# Altium PCB Test6502_project_attempt_1(1).PcbDoc
Units mm, origin at the board's own origin, x right, y up, seen from the top; angles counter-clockwise.
Board outline 152.4 x 101.6 mm, 2 copper layers (F.Cu, B.Cu); 29 components, 99 nets, 323 pads, 7 vias.
Unrouted connection lines stored in the file: 20.
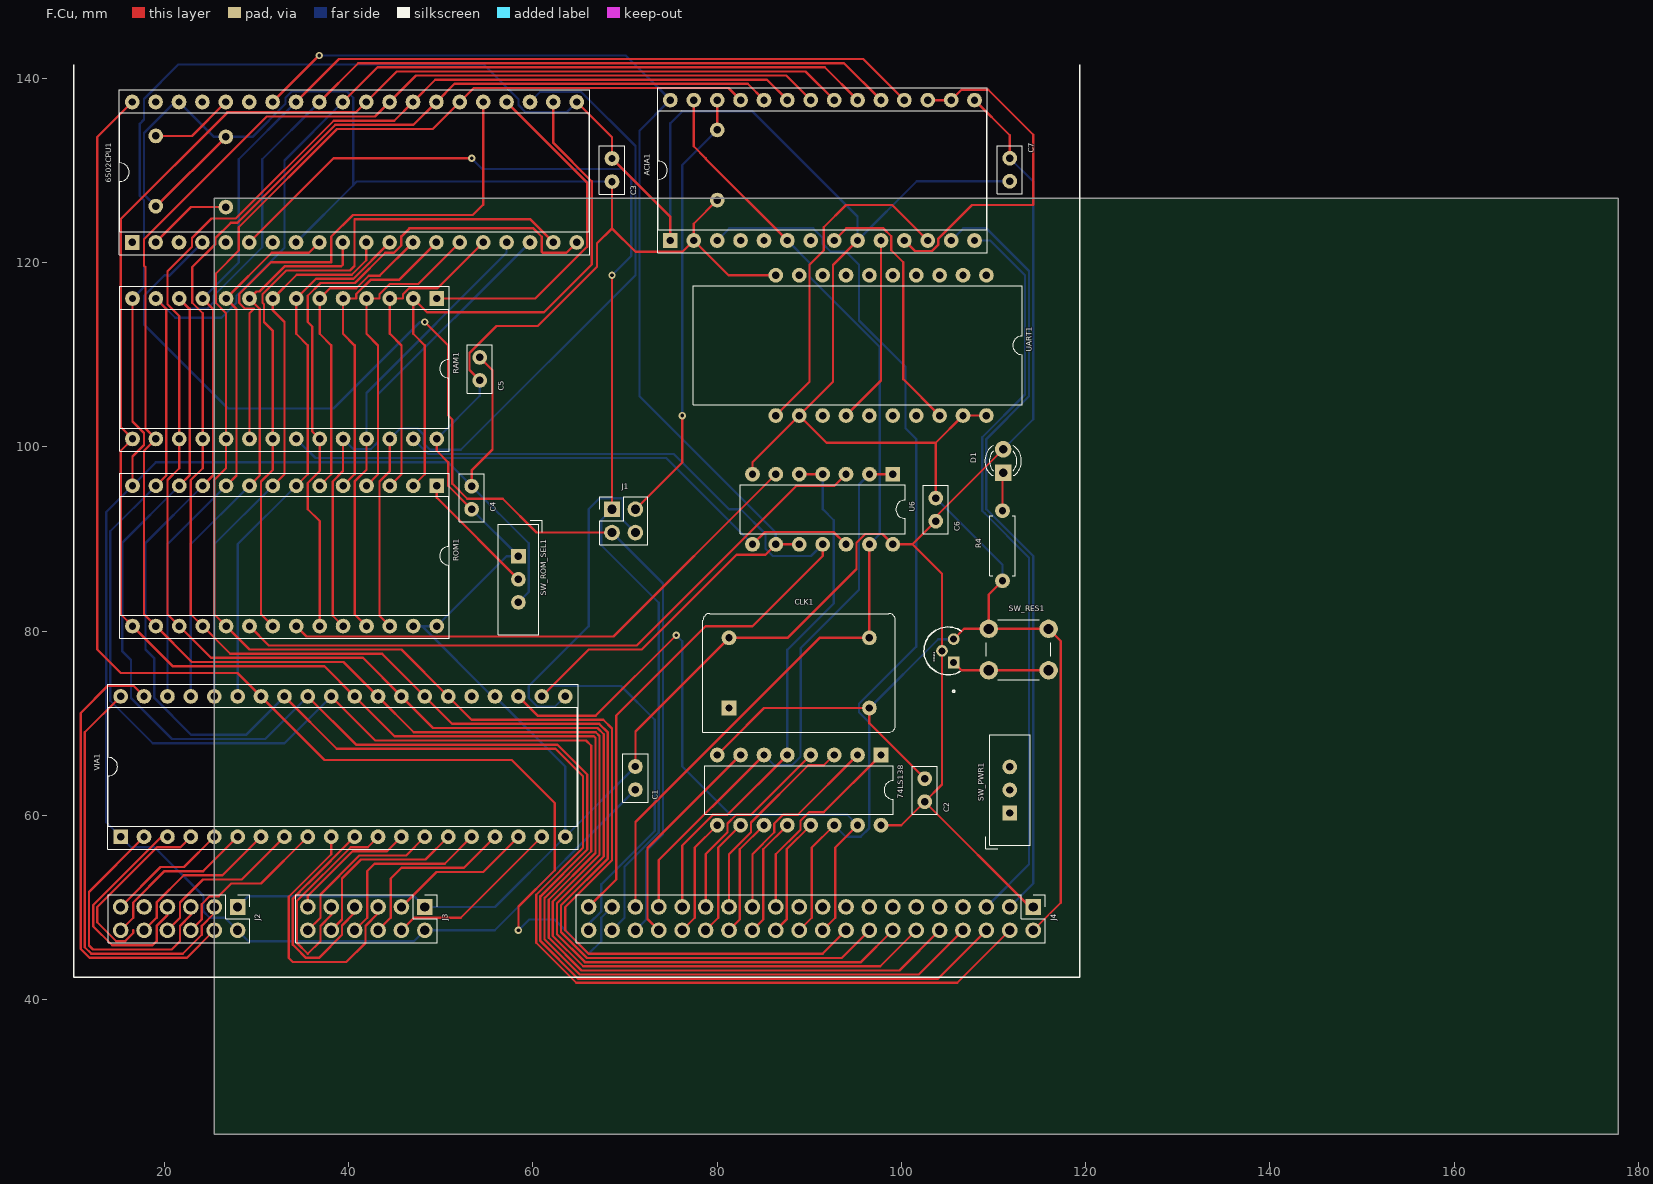
[diagram p0: F.Cu view]
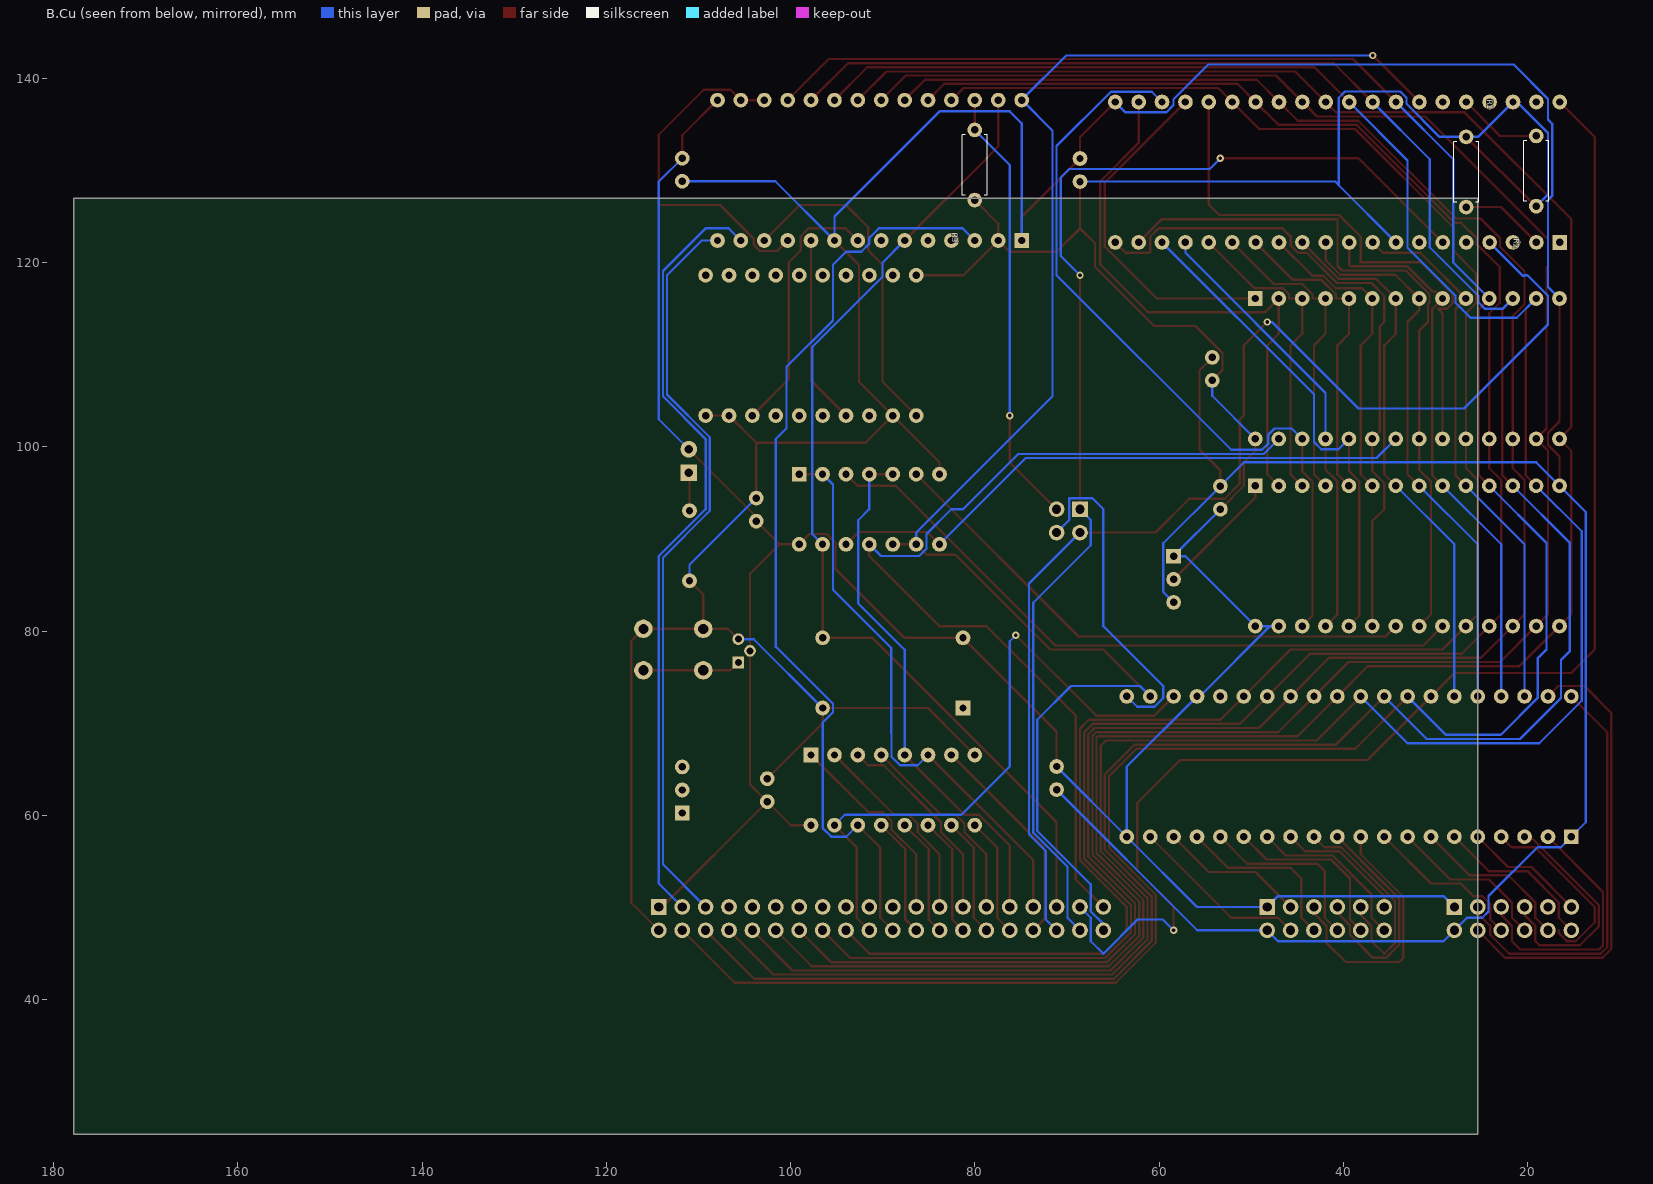
[diagram p1: B.Cu view, seen from below]

## Layer stack, top to bottom
F.Mask: solder mask 0.0102, Solder Resist, Dk 3.5
F.Cu: signal copper 0.0356
Dielectric 1: dielectric 0.32, FR-4, Dk 4.8
B.Cu: signal copper 0.0356
B.Mask: solder mask 0.0102, Solder Resist, Dk 3.5

## Board outline
25.4,25.4 177.8,25.4 177.8,127 25.4,127

## Design rules (kind name [scope] priority, off if disabled: settings)
Clearance [All] p1: gap=0.254 ignorepadtopadclearanceinfootprint=FALSE except(0: Arc-Hole Track-Hole SMDPad-Hole THPad-Hole Via-Hole Fill-Hole Poly-Hole Region-Hole Text-Hole)
MinimumSolderMaskSliver [All] p1: minsoldermaskwidth=0
PolygonConnect [All] p1: connectstyle=Direct reliefconductorwidth=0.254 reliefentries=4 polygonreliefangle="90 Angle" airgapwidth=0.254
RoutingVias [All] p1: holewidth=0.711 width=1.27 viastyle="Through Hole" minholewidth=0.711 minwidth=1.27 maxholewidth=0.711 maxwidth=1.27
SilkToSilkClearance [All] p1: silktosilkclearance=0
SilkToSolderMaskClearance [IsPad] p1: minsilkscreentomaskgap=0 clearancetoexposedcopper=TRUE
SolderMaskExpansion [All] p1: expansion=0.102 istentingtop=FALSE
Width [All] p1: maxlimit=10 minlimit=0.254 preferedwidth=0.254 minimp=50.000000 maximp=50.000000 favimp=50.000000
27 further rules are at their usual default settings.

## Components (designator, comment, footprint, x,y, rotation, side; value= is the part's Value field where it differs from the comment)
74LS138 "74LS138" DIP-16_W7.62mm 97.775,66.55 r270 top
6502CPU1 "W65C02SxP" DIP-40_W15.24mm_Socket 16.494,122.188 r90 top
ACIA1 "W65C51NxP" DIP-28_W15.24mm_Socket 74.915,122.393 r90 top
C1 "0.1uF" C_Disc_D5.0mm_W2.5mm_P2.50mm 71.12,65.29 r270 top
C2 "0.1uF" C_Disc_D5.0mm_W2.5mm_P2.50mm 102.522,61.479 r90 top
C3 "0.1uF" C_Disc_D5.0mm_W2.5mm_P2.50mm 68.58,128.79 r90 top
C4 "0.1uF" C_Disc_D5.0mm_W2.5mm_P2.50mm 53.34,93.23 r90 top
C5 "0.1uF" C_Disc_D5.0mm_W2.5mm_P2.50mm 54.231,107.207 r90 top
C6 "0.1uF" C_Disc_D5.0mm_W2.5mm_P2.50mm 103.725,91.931 r90 top
C7 "0.1uF" C_Disc_D5.0mm_W2.5mm_P2.50mm 111.76,131.33 r270 top
CLK1 "CXO_DIP14" Oscillator_DIP-14 81.28,71.64 r0 top
D1 "LED" LED_D3.0mm 111.041,97.193 r90 top
DS1813 "DS1813-5" 21-0248A 104.398,79.121 r90 top
J1 "INT_JMP" PinHeader_2x02_P2.54mm_Vertical 68.58,93.23 r0 top
J2 "VIA_PORTA" PinHeader_2x06_P2.54mm_Vertical 27.94,50.05 r270 top
J3 "VIA_PORTB" PinHeader_2x06_P2.54mm_Vertical 48.26,50.05 r270 top
J4 "Expansion_Header" PinHeader_2x20_P2.54mm_Vertical 114.3,50.05 r270 top
R1 "3.3k" R_Axial_DIN0207_L6.3mm_D2.5mm_P7.62mm_Horizontal#1 26.664,133.643 r90 bottom
R2 "3.3k" R_Axial_DIN0207_L6.3mm_D2.5mm_P7.62mm_Horizontal#1 19.056,126.126 r270 bottom
R3 "3.3k" R_Axial_DIN0207_L6.3mm_D2.5mm_P7.62mm_Horizontal#1 80.012,126.78 r270 bottom
R4 "220" R_Axial_DIN0207_L6.3mm_D2.5mm_P7.62mm_Horizontal#2 110.971,85.449 r90 top
RAM1 "HM62256BLP" DIP-28_W15.24mm_Socket 49.545,116.095 r270 top
ROM1 "28C256" DIP-28_W15.24mm_Socket 49.545,95.775 r270 top
SW_PWR1 "SW_SPDT" SW_THT_DPDT 111.76,62.75 r90 top
SW_RES1 "SW_Push" SW_PUSH_6mm 109.476,80.24 r0 top
SW_ROM_SEL1 "SW_SPDT" SW_THT_DPDT 58.42,85.61 r270 top
U6 "74LS00" DIP-14_W7.62mm 99.065,97.03 r270 top
UART1 "USB_UART_BOARD" DIP-20_W15.24mm_UART 111.76,118.63 r270 top
VIA1 "W65C22SxP" DIP-40_W15.24mm_Socket 15.24,57.665 r90 top

## Footprints (in the part's own frame and the unit in brackets; to place one, negate y for a bottom-side part, rotate by r counter-clockwise, add the part's x,y. Pads: shape width x height; smd on the part's side, far side on the other; paste and mask are expansions set on the pad)
21-0248A [mil]
  rect 50x50 hole 30 paste-50 mask+0: 1(-100,-50)
  round 50 hole 30 paste-50 mask+0: 2(-50,0) 3(0,-50)
  silkscreen extent -228,-85 52,77
C_Disc_D5.0mm_W2.5mm_P2.50mm [mm]
  round 1.6 hole 0.8 paste-1.6 mask+0: 1(0,0) 2(2.5,0)
  silkscreen extent -1.37,-1.37 3.87,1.37
DIP-14_W7.62mm [mm]
  rect 1.6x1.6 hole 0.8 paste-1.6 mask+0: 1(0,0)
  rrect100% 1.6x1.6 hole 0.8 paste-1.6 mask+0: 2(0,-2.54) 3(0,-5.08) 4(0,-7.62) 5(0,-10.16) 6(0,-12.7) 7(0,-15.24) 8(7.62,-15.24) 9(7.62,-12.7) 10(7.62,-10.16) 11(7.62,-7.62) 12(7.62,-5.08) 13(7.62,-2.54) 14(7.62,0)
  silkscreen extent 1.16,-16.57 6.46,1.33
DIP-16_W7.62mm [mm]
  rect 1.6x1.6 hole 0.8 paste-1.6 mask+0: 1(0,0)
  rrect100% 1.6x1.6 hole 0.8 paste-1.6 mask+0: 2(0,-2.54) 3(0,-5.08) 4(0,-7.62) 5(0,-10.16) 6(0,-12.7) 7(0,-15.24) 8(0,-17.78) 9(7.62,-17.78) 10(7.62,-15.24) 11(7.62,-12.7) 12(7.62,-10.16) 13(7.62,-7.62) 14(7.62,-5.08) 15(7.62,-2.54) 16(7.62,0)
  silkscreen extent 1.16,-19.11 6.46,1.33
DIP-20_W15.24mm_UART [mm]
  rrect100% 1.6x1.6 hole 0.8 paste-1.6 mask+0: 1(0,-2.54) 2(0,-5.08) 3(0,-7.62) 4(0,-10.16) 5(0,-12.7) 6(0,-15.24) 7(0,-17.78) 8(0,-20.32) 9(0,-22.86) 10(0,-25.4) 11(15.24,-25.4) 12(15.24,-22.86) 13(15.24,-20.32) 14(15.24,-17.78) 15(15.24,-15.24) 16(15.24,-12.7) 17(15.24,-10.16) 18(15.24,-7.62) 19(15.24,-5.08) 20(15.24,-2.54)
  silkscreen extent 1.16,-34.35 14.08,1.33
DIP-28_W15.24mm_Socket [mm]
  rect 1.6x1.6 hole 0.8 paste-1.6 mask+0: 1(0,0)
  rrect100% 1.6x1.6 hole 0.8 paste-1.6 mask+0: 2(0,-2.54) 3(0,-5.08) 4(0,-7.62) 5(0,-10.16) 6(0,-12.7) 7(0,-15.24) 8(0,-17.78) 9(0,-20.32) 10(0,-22.86) 11(0,-25.4) 12(0,-27.94) 13(0,-30.48) 14(0,-33.02) 15(15.24,-33.02) 16(15.24,-30.48) 17(15.24,-27.94) 18(15.24,-25.4) 19(15.24,-22.86) 20(15.24,-20.32) 21(15.24,-17.78) 22(15.24,-15.24) 23(15.24,-12.7) 24(15.24,-10.16) 25(15.24,-7.62) 26(15.24,-5.08) 27(15.24,-2.54) 28(15.24,0)
  silkscreen extent -1.33,-34.41 16.57,1.39
DIP-40_W15.24mm_Socket [mm]
  rect 1.6x1.6 hole 0.8 paste-1.6 mask+0: 1(0,0)
  rrect100% 1.6x1.6 hole 0.8 paste-1.6 mask+0: 2(0,-2.54) 3(0,-5.08) 4(0,-7.62) 5(0,-10.16) 6(0,-12.7) 7(0,-15.24) 8(0,-17.78) 9(0,-20.32) 10(0,-22.86) 11(0,-25.4) 12(0,-27.94) 13(0,-30.48) 14(0,-33.02) 15(0,-35.56) 16(0,-38.1) 17(0,-40.64) 18(0,-43.18) 19(0,-45.72) 20(0,-48.26) 21(15.24,-48.26) 22(15.24,-45.72) 23(15.24,-43.18) 24(15.24,-40.64) 25(15.24,-38.1) 26(15.24,-35.56) 27(15.24,-33.02) 28(15.24,-30.48) 29(15.24,-27.94) 30(15.24,-25.4) 31(15.24,-22.86) 32(15.24,-20.32) 33(15.24,-17.78) 34(15.24,-15.24) 35(15.24,-12.7) 36(15.24,-10.16) 37(15.24,-7.62) 38(15.24,-5.08) 39(15.24,-2.54) 40(15.24,0)
  silkscreen extent -1.33,-49.65 16.57,1.39
LED_D3.0mm [mm]
  rect 1.8x1.8 hole 0.9 paste-1.8 mask+0: 1(0,0)
  round 1.8 hole 0.9 paste-1.8 mask+0: 2(2.54,0)
  silkscreen extent -0.29,-1.99 2.94,1.99
Oscillator_DIP-14 [mm]
  rect 1.6x1.6 hole 0.8 paste-1.6 mask+0: 1(0,0)
  round 1.6 hole 0.8 paste-1.6 mask+0: 7(15.24,0) 8(15.24,7.62) 14(0,7.62)
  silkscreen extent -2.83,-2.64 18.07,10.26
PinHeader_2x02_P2.54mm_Vertical [mm]
  rect 1.7x1.7 hole 1 paste-1.7 mask+0: 1(0,0)
  rrect100% 1.7x1.7 hole 1 paste-1.7 mask+0: 2(2.54,0) 3(0,-2.54) 4(2.54,-2.54)
  silkscreen extent -1.33,-3.87 3.87,1.33
PinHeader_2x06_P2.54mm_Vertical [mm]
  rect 1.7x1.7 hole 1 paste-1.7 mask+0: 1(0,0)
  rrect100% 1.7x1.7 hole 1 paste-1.7 mask+0: 2(2.54,0) 3(0,-2.54) 4(2.54,-2.54) 5(0,-5.08) 6(2.54,-5.08) 7(0,-7.62) 8(2.54,-7.62) 9(0,-10.16) 10(2.54,-10.16) 11(0,-12.7) 12(2.54,-12.7)
  silkscreen extent -1.33,-14.03 3.87,1.33
PinHeader_2x20_P2.54mm_Vertical [mm]
  rect 1.7x1.7 hole 1 paste-1.7 mask+0: 1(0,0)
  rrect100% 1.7x1.7 hole 1 paste-1.7 mask+0: 2(2.54,0) 3(0,-2.54) 4(2.54,-2.54) 5(0,-5.08) 6(2.54,-5.08) 7(0,-7.62) 8(2.54,-7.62) 9(0,-10.16) 10(2.54,-10.16) 11(0,-12.7) 12(2.54,-12.7) 13(0,-15.24) 14(2.54,-15.24) 15(0,-17.78) 16(2.54,-17.78) 17(0,-20.32) 18(2.54,-20.32) 19(0,-22.86) 20(2.54,-22.86) 21(0,-25.4) 22(2.54,-25.4) 23(0,-27.94) 24(2.54,-27.94) 25(0,-30.48) 26(2.54,-30.48) 27(0,-33.02) 28(2.54,-33.02) 29(0,-35.56) 30(2.54,-35.56) 31(0,-38.1) 32(2.54,-38.1) 33(0,-40.64) 34(2.54,-40.64) 35(0,-43.18) 36(2.54,-43.18) 37(0,-45.72) 38(2.54,-45.72) 39(0,-48.26) 40(2.54,-48.26)
  silkscreen extent -1.33,-49.59 3.87,1.33
R_Axial_DIN0207_L6.3mm_D2.5mm_P7.62mm_Horizontal#1 [mm]
  round 1.6 hole 0.8 paste-1.6 mask+0: 1(0,0)
  rrect100% 1.6x1.6 hole 0.8 paste-1.6 mask+0: 2(-7.62,0)
  silkscreen extent -7.08,-1.37 -0.54,1.37
R_Axial_DIN0207_L6.3mm_D2.5mm_P7.62mm_Horizontal#2 [mm]
  round 1.6 hole 0.8 paste-1.6 mask+0: 1(0,0)
  rrect100% 1.6x1.6 hole 0.8 paste-1.6 mask+0: 2(7.62,0)
  silkscreen extent 0.54,-1.37 7.08,1.37
SW_PUSH_6mm [mm]
  round 2 hole 1.1 paste-2 mask+0: 1(0,0) 1(6.5,0) 2(0,-4.5) 2(6.5,-4.5)
  silkscreen extent -0.25,-5.5 6.75,1
SW_THT_DPDT [mm]
  rect 1.6x1.6 hole 0.8 paste-1.6 mask+0: 1(-2.5,0)
  round 1.6 hole 0.8 paste-1.6 mask+0: 2(0,0) 3(2.5,0)
  silkscreen extent -6.4,-2.2 6,2.6

## Part data
74LS138: library part DIP-16_W7.62mm, "16-lead though-hole mounted DIP package, row spacing 7.62 mm (300 mils)", Sheetfile=Test6502_project.kicad_sch
6502CPU1 VIA1: library part DIP-40_W15.24mm_Socket, "40-lead though-hole mounted DIP package, row spacing 15.24 mm (600 mils), Socket", Sheetfile=Test6502_project.kicad_sch
ACIA1 RAM1 ROM1: library part DIP-28_W15.24mm_Socket, "28-lead though-hole mounted DIP package, row spacing 15.24 mm (600 mils), Socket", Sheetfile=Test6502_project.kicad_sch
C1 C2 C3 C4 C5 C6 C7: library part C_Disc_D5.0mm_W2.5mm_P2.50mm, "C, Disc series, Radial, pin pitch=2.50mm, , diameter*width=5*2.5mm^2, Capacitor, http://cdn-reichelt.de/documents/datenblatt/B300/DS_KERKO_TC.pdf", Sheetfile=Test6502_project.kicad_sch
CLK1: library part Oscillator_DIP-14, "Oscillator, DIP14, http://cdn-reichelt.de/documents/datenblatt/B400/OSZI.pdf", Sheetfile=Test6502_project.kicad_sch
D1: library part LED_D3.0mm, "LED, diameter 3.0mm, 2 pins", Sheetfile=Test6502_project.kicad_sch
DS1813: library part 21-0248A, MANUFACTURER_PART_NUMBER=ds18135+, Sheetfile=Test6502_project.kicad_sch, VENDOR=MAXIM
J1: library part PinHeader_2x02_P2.54mm_Vertical, "Through hole straight pin header, 2x02, 2.54mm pitch, double rows", Sheetfile=Test6502_project.kicad_sch
J2 J3: library part PinHeader_2x06_P2.54mm_Vertical, "Through hole straight pin header, 2x06, 2.54mm pitch, double rows", Sheetfile=Test6502_project.kicad_sch
J4: library part PinHeader_2x20_P2.54mm_Vertical, "Through hole straight pin header, 2x20, 2.54mm pitch, double rows", Sheetfile=Test6502_project.kicad_sch
R1 R2 R3 R4: library part R_Axial_DIN0207_L6.3mm_D2.5mm_P7.62mm_Horizontal, "Resistor, Axial_DIN0207 series, Axial, Horizontal, pin pitch=7.62mm, 0.25W = 1/4W, length*diameter=6.3*2.5mm^2, http://cdn-reichelt.de/documents/datenblatt/B400/1_4W%23YAG.pdf", Sheetfile=Test6502_project.kicad_sch
SW_PWR1 SW_ROM_SEL1: library part SW_THT_DPDT, "E-Switch sub miniature slide switch, EG series, DPDT, http://spec_sheets.e-switch.com/specs/P040047.pdf", Sheetfile=Test6502_project.kicad_sch
SW_RES1: library part SW_PUSH_6mm, "https://www.omron.com/ecb/products/pdf/en-b3f.pdf", Sheetfile=Test6502_project.kicad_sch
U6: library part DIP-14_W7.62mm, "14-lead though-hole mounted DIP package, row spacing 7.62 mm (300 mils)", Sheetfile=Test6502_project.kicad_sch
UART1: library part DIP-20_W15.24mm_UART, "28-lead though-hole mounted DIP package, row spacing 15.24 mm (600 mils)", Sheetfile=Test6502_project.kicad_sch

## Via types
v1: diameter 0.8, hole 0.4, F.Cu to B.Cu, tented both sides, 7 vias

## Nets (pads, with @x,y where several pads share a name; then routed paths per layer and width w, separated by ;. In a path a pad name is that pad's centre, name@x,y a point inside that pad or via, vN(x,y) a via of type N, cw(c..) or ccw(c..) an arc to the next point about the centre after c; other vN are vias at no path point)
+5V: 74LS138.16 6502CPU1.8 6502CPU1.38 ACIA1.2 ACIA1.15 C1.1 C2.1 C3.1 C4.1 C5.1 C6.1 C7.1 CLK1.14 D1.2 DS1813.2 J2.1 J3.1 J4.1 R1.1 R2.1 R3.1 RAM1.28 ROM1.27 ROM1.28 SW_ROM_SEL1.1 U6.14 UART1.10 VIA1.20 VIA1.24 | length 425.2
  F.Cu w0.25: R2.1 19.147,126.126 R1.1 ; RAM1.28 49.545,99.565 50.8,98.31 50.8,95.77 C4.1 ; C5.1 53.106,108.331 53.106,110.172 56.047,113.114 60.521,113.114 66.958,119.551 66.958,122.088 68.58,123.71 ; C3.1 68.58,123.71 ; C1.1 71.12,69.1 CLK1.14 87.63,79.26 95.11,86.74 95.11,89.585 96.059,90.535 97.94,90.535 U6.14 101.204,89.41 ; R3.1 77.455,124.223 ACIA1.2 ; UART1.10 81.218,118.63 ACIA1.2 ; 74LS138.16 99.973,58.93 C2.1 ; ACIA1.15 111.76,133.808 C7.1 ; D1.2 103.725,92.417 C6.1 101.204,89.41 ; J4.1 113.95,50.05 C2.1 ; 68.58,123.71 71.12,121.17 76.232,121.17 ACIA1.2 ; 101.204,89.41 104.398,86.217 DS1813.2 104.398,63.355 C2.1
  B.Cu w0.25: R2.1 17.78,127.403 17.78,134.061 21.148,137.428 6502CPU1.38 25.36,133.643 R1.1 29.539,133.643 33.137,137.24 33.137,137.881 33.821,138.566 39.807,138.566 40.489,137.884 40.489,128.403 ; J2.1 29.115,51.225 47.085,51.225 J3.1 55.885,50.05 VIA1.20 ; 6502CPU1.8 40.489,128.403 ; RAM1.28 54.231,105.541 C5.1 ; C4.1 58.42,88.15 SW_ROM_SEL1.1 57.12,88.11 ROM1.28 ROM1.27 47.955,80.535 55.585,72.905 VIA1.24 63.5,65.285 VIA1.20 ; C3.1 40.876,128.79 40.489,128.403 ; C1.1 63.5,57.67 VIA1.20 ; D1.2 114.3,102.992 114.3,128.79 C7.1
A0: 6502CPU1.9 ACIA1.13 J4.3 RAM1.10 ROM1.10 VIA1.38 | length 144.4
  F.Cu w0.25: ROM1.10 27.81,96.9 27.81,114.97 RAM1.10 31.654,121.064 35.69,121.064 6502CPU1.9
  B.Cu w0.25: VIA1.38 20.32,89.41 ROM1.10 ; ACIA1.13 106.712,123.71 109.22,123.71 113.85,119.08 113.85,105.48 109.22,100.85 109.22,93.23 114.3,88.15 114.3,52.59 J4.3
A1: 6502CPU1.10 ACIA1.14 J4.5 RAM1.9 ROM1.9 VIA1.37 | length 142.4
  F.Cu w0.25: ROM1.9 30.35,96.9 30.35,114.97 RAM1.9 29.992,116.862 30.306,116.862 33.03,119.586 39.177,119.586 39.354,119.763 6502CPU1.10
  B.Cu w0.25: VIA1.37 22.86,89.41 ROM1.9 ; ACIA1.14 109.637,122.393 113.401,118.63 113.401,105.667 108.77,101.036 108.77,93.044 109.034,92.78 113.85,87.964 113.85,54.68 J4.5
A2: 6502CPU1.11 J4.7 RAM1.8 ROM1.8 VIA1.36 | length 60.6
  F.Cu w0.25: ROM1.8 33.02,97.03 33.02,113.55 31.765,114.805 RAM1.8 34.357,118.687 40.32,118.687 41.894,120.261 6502CPU1.11
  B.Cu w0.25: VIA1.36 25.4,89.41 ROM1.8
A3: 6502CPU1.12 J4.9 RAM1.7 ROM1.7 VIA1.35 | length 59.5
  F.Cu w0.25: ROM1.7 35.56,97.03 35.56,111.01 34.305,112.265 RAM1.7 36.447,118.237 40.506,118.237 44.434,122.165 6502CPU1.12
  B.Cu w0.25: VIA1.35 27.94,89.41 ROM1.7
A4: 6502CPU1.13 J4.11 RAM1.6 ROM1.6 | length 34
  F.Cu w0.25: ROM1.6 38.1,97.03 38.1,111.01 36.845,112.265 RAM1.6 37.97,117.22 40.823,117.22 42.172,118.568 43.354,118.568 6502CPU1.13
A5: 6502CPU1.14 J4.13 RAM1.5 ROM1.5 | length 34.3
  F.Cu w0.25: ROM1.5 40.64,97.03 40.64,111.01 39.385,112.265 RAM1.5 39.39,116.09 40.8,116.09 40.8,116.561 42.358,118.119 45.444,118.119 6502CPU1.14
A6: 6502CPU1.15 J4.15 RAM1.4 ROM1.4 | length 34.3
  F.Cu w0.25: ROM1.4 43.18,97.03 43.18,111.01 41.925,112.265 RAM1.4 41.93,116.09 43.34,116.09 43.34,116.561 44.449,117.669 47.535,117.669 6502CPU1.15
A7: 6502CPU1.16 J4.17 RAM1.3 ROM1.3 | length 34.3
  F.Cu w0.25: ROM1.3 45.72,97.03 45.72,111.01 44.465,112.265 RAM1.3 44.47,116.09 45.88,116.09 45.88,116.561 46.539,117.22 49.625,117.22 6502CPU1.16
A8: 6502CPU1.17 J4.19 RAM1.25 ROM1.25 | length 49
  F.Cu w0.25: ROM1.25 40.64,81.82 40.64,96.22 41.925,97.505 RAM1.25
  B.Cu w0.25: RAM1.25 41.925,105.848 57.134,121.057 6502CPU1.17
A9: 6502CPU1.18 J4.21 RAM1.24 ROM1.24 | length 54.3
  F.Cu w0.25: ROM1.24 38.26,81.66 38.26,96.241 39.385,97.365 RAM1.24
  B.Cu w0.25: RAM1.24 40.51,99.73 42.391,99.73 43.18,100.52 43.18,105.694 6502CPU1.18
A10: 74LS138.1 6502CPU1.19 J4.23 RAM1.21 ROM1.21 | length 98.7
  F.Cu w0.25: ROM1.21 30.48,81.82 30.48,96.22 31.765,97.505 RAM1.21 31.765,112.584 30.799,113.55 30.799,115.471 30.64,115.629 30.64,116.561 33.216,119.136 40.134,119.136 40.636,119.638 40.636,124.716 59.687,124.716 6502CPU1.19 ; J4.23 86.36,55.771 89.03,58.441 89.03,59.396 89.98,60.345 91.57,60.345 74LS138.1
A11: 74LS138.2 6502CPU1.20 J4.25 RAM1.23 ROM1.23 | length 94.9
  F.Cu w0.25: ROM1.23 36.845,91.945 35.56,93.23 35.56,96.08 36.845,97.365 RAM1.23 36.045,101.655 36.045,113.065 35.56,113.55 35.56,116.4 36.947,117.788 40.692,117.788 43.968,121.064 44.9,121.064 45.715,121.879 45.715,122.841 46.584,123.71 60.057,123.71 60.96,122.807 60.96,121.17 61.066,121.064 63.63,121.064 6502CPU1.20 ; J4.25 83.82,55.771 86.203,58.153 86.203,59.108 87.149,60.055 88.74,60.055 74LS138.2
A12: 74LS138.3 6502CPU1.22 J4.27 RAM1.2 ROM1.2 | length 85.1
  F.Cu w0.25: ROM1.2 48.26,97.03 48.26,111.01 47.005,112.265 RAM1.2 48.494,114.606 61.189,114.606 66.387,119.804 66.387,128.811 62.214,132.984 6502CPU1.22 ; J4.27 81.28,55.771 83.66,58.15 83.66,59.207 89.878,65.425 91.57,65.425 74LS138.3
A13: 74LS138.4 6502CPU1.23 J4.29 RAM1.26 ROM1.26 | length 108.3
  F.Cu w0.25: ROM1.26 43.34,81.66 43.34,96.241 44.465,97.365 RAM1.26 ; J4.29 78.74,55.771 81.12,58.15 81.12,59.105 82.069,60.055 83.66,60.055 74LS138.4
  B.Cu w0.25: RAM1.26 45.59,101.98 47.471,101.98 48.13,101.321 48.13,100.366 48.818,99.678 52.168,99.678 71.12,118.63 71.12,132.653 65.22,138.553 60.799,138.553 6502CPU1.23
A14: 74LS138.5 6502CPU1.24 J4.31 RAM1.1 U6.4 U6.5 | length 95.7
  F.Cu w0.25: RAM1.1 60.251,116.095 65.879,121.723 65.879,128.684 6502CPU1.24 ; J4.31 76.2,56.725 79.529,60.055 81.12,60.055 74LS138.5 ; U6.5 U6.4
  B.Cu w0.25: 74LS138.5 87.615,77.971 92.641,82.996 92.641,92.038 91.445,93.234 U6.4
A15: 74LS138.6 6502CPU1.25 J4.33 RAM1.20 U6.1 U6.2 | length 122.8
  F.Cu w0.25: RAM1.20 29.225,114.505 29.691,114.97 28.759,114.97 28.1,115.629 28.1,116.561 31.575,120.035 38.1,120.035 38.1,122.816 40.449,125.165 53.469,125.165 54.594,126.29 6502CPU1.25 ; J4.33 73.66,52.53 ; 73.661,52.531 73.661,55.136 74LS138.6 ; U6.2 U6.1
  B.Cu w0.25: 74LS138.6 86.2,65.425 88.11,65.425 89.03,66.346 89.03,68.942 89.06,68.972 89.06,78.15 95.4,84.49 95.4,95.905 U6.2
ACIA_RX: ACIA1.12 UART1.11 | length 36.5
  F.Cu w0.25: UART1.11 90.025,107.055 90.025,119.755 91.57,121.3 91.57,123.84 93.98,126.25 98.998,126.25 ACIA1.12
ACIA_TX: ACIA1.10 UART1.14 | length 20.6
  F.Cu w0.25: UART1.14 97.775,107.185 ACIA1.10
CA1: J2.3 VIA1.40 | length 46.3
  F.Cu w0.25: VIA1.40 11.351,69.016 11.351,45.683 12.064,44.97 21.981,44.97 24.035,47.024 24.035,47.996 25.4,49.362 J2.3
CA2: J2.4 VIA1.39 | length 50.3
  F.Cu w0.25: VIA1.39 16.655,74.03 13.82,74.03 10.902,71.112 10.902,45.497 11.878,44.52 22.41,44.52 J2.4
CB1: J3.3 VIA1.18 | length 15.9
  F.Cu w0.25: J3.3 49.513,53.843 54.598,53.843 VIA1.18
CB2: J3.4 VIA1.19 | length 19.4
  F.Cu w0.25: J3.4 47.085,48.875 52.17,48.875 VIA1.19
CLK: 6502CPU1.37 ACIA1.6 ACIA1.27 CLK1.8 J4.35 U6.13 VIA1.25 | length 110.1
  F.Cu w0.25: J4.35 71.12,59.265 91.115,79.26 CLK1.8 96.52,89.405 U6.13 ; ACIA1.27 77.455,132.615 78.74,131.33 78.74,131.268 ACIA1.6
  B.Cu w0.25: ACIA1.6 90.025,119.984 90.025,118.455 97.65,110.83 97.65,90.535 U6.13
D0: 6502CPU1.33 ACIA1.18 J4.4 RAM1.11 ROM1.11 VIA1.33 | length 271.9
  F.Cu w0.25: ROM1.11 25.27,96.9 25.27,114.97 RAM1.11 ; VIA1.33 38.702,67.223 62.438,67.223 65.433,64.228 65.433,56.465 60.353,51.385 60.353,46.164 64.705,41.812 106.062,41.812 J4.4 ; 6502CPU1.33 38.942,142.097 95.852,142.097 ACIA1.18
  B.Cu w0.25: ROM1.11 17.94,89.57 17.94,77.988 18.905,77.024 18.905,72.73 22.906,68.729 28.844,68.729 VIA1.33 ; RAM1.11 28.07,120.02 28.07,131.224 6502CPU1.33
D1: 6502CPU1.32 ACIA1.19 J4.6 RAM1.12 ROM1.12 VIA1.32 | length 271.9
  F.Cu w0.25: ROM1.12 22.73,96.9 22.73,114.97 RAM1.12 ; VIA1.32 40.792,67.673 62.624,67.673 65.883,64.414 65.883,56.278 60.803,51.198 60.803,46.35 64.891,42.262 103.972,42.262 J4.6 ; 6502CPU1.32 41.033,141.647 93.761,141.647 ACIA1.19
  B.Cu w0.25: ROM1.12 15.4,89.57 15.4,77.83 16.365,76.865 16.365,72.73 20.815,68.28 30.935,68.28 VIA1.32 ; RAM1.12 22.73,114.97 24.611,114.97 25.35,115.709 25.35,116.404 30.61,121.664 30.61,131.224 6502CPU1.32
D2: 6502CPU1.31 ACIA1.20 J4.8 RAM1.13 ROM1.13 VIA1.31 | length 273
  F.Cu w0.25: ROM1.13 20.19,96.9 20.19,114.97 RAM1.13 ; VIA1.31 42.883,68.122 65.748,68.122 66.332,67.538 66.332,56.092 61.516,51.276 61.252,51.012 61.252,46.536 65.077,42.711 101.881,42.711 J4.8 ; 6502CPU1.31 43.123,141.198 91.671,141.198 ACIA1.20
  B.Cu w0.25: ROM1.13 14.115,90.825 14.115,72.439 18.725,67.83 33.025,67.83 VIA1.31 ; RAM1.13 21.16,114 26.18,114 27.81,115.629 27.81,116.4 33.02,121.61 33.02,131.094 6502CPU1.31
D3: 6502CPU1.30 ACIA1.21 J4.10 RAM1.15 ROM1.15 VIA1.30 | length 255.5
  F.Cu w0.25: VIA1.30 37.353,76.192 20.868,76.192 ROM1.15 15.24,81.82 15.24,99.57 RAM1.15 15.24,102.14 15.24,124.717 26.827,136.304 40.77,136.304 6502CPU1.30 45.214,140.748 89.58,140.748 ACIA1.21 ; VIA1.30@40.958,72.587 44.973,68.572 66.627,68.572 66.782,68.417 66.782,55.906 61.702,50.826 61.702,46.722 65.264,43.161 99.791,43.161 J4.10
D4: 6502CPU1.29 ACIA1.22 J4.12 RAM1.16 ROM1.16 VIA1.29 | length 243.8
  F.Cu w0.25: ACIA1.22 87.49,140.299 47.304,140.299 6502CPU1.29 42.86,135.854 31.11,135.854 17.78,122.524 17.78,119.665 17.94,119.504 17.94,101.98 RAM1.16 17.78,99.57 17.78,81.82 ROM1.16 22.959,76.641 39.444,76.641 VIA1.29 47.064,69.021 66.813,69.021 67.231,68.603 67.231,55.72 62.151,50.64 62.151,46.908 65.45,43.61 97.7,43.61 J4.12
D5: 6502CPU1.28 ACIA1.23 J4.14 RAM1.17 ROM1.17 VIA1.28 | length 231.4
  F.Cu w0.25: ACIA1.23 85.399,139.849 49.395,139.849 6502CPU1.28 44.951,135.405 38.363,135.405 27.739,124.781 25.116,124.781 22.99,122.654 22.99,121.723 20.32,119.053 20.32,115.476 21.605,114.191 RAM1.17 21.605,97.679 20.32,96.394 20.32,81.82 ROM1.17 25.049,77.091 41.534,77.091 VIA1.28 49.154,69.471 66.999,69.471 67.681,68.789 67.681,55.534 62.601,50.454 62.601,47.095 65.636,44.06 95.61,44.06 J4.14
D6: 6502CPU1.27 ACIA1.24 J4.16 RAM1.18 ROM1.18 VIA1.27 | length 220.3
  F.Cu w0.25: ACIA1.24 83.309,139.4 51.485,139.4 6502CPU1.27 47.041,134.955 38.55,134.955 27.926,124.331 27.207,124.331 25.53,122.654 25.53,122.014 23.02,119.504 23.02,115.629 24.145,114.505 RAM1.18 24.145,97.679 22.86,96.394 22.86,81.82 ROM1.18 27.14,77.54 43.625,77.54 VIA1.27 51.245,69.92 67.186,69.92 68.13,68.976 68.13,55.316 63.314,50.5 63.05,50.236 63.05,47.324 65.59,44.784 65.865,44.509 93.519,44.509 J4.16
D7: 6502CPU1.26 ACIA1.25 J4.18 RAM1.19 ROM1.19 VIA1.26 | length 210.2
  F.Cu w0.25: ACIA1.25 81.218,138.95 53.576,138.95 6502CPU1.26 49.132,134.506 38.736,134.506 28.07,123.84 28.07,121.3 25.56,118.79 25.56,115.629 26.685,114.505 RAM1.19 26.685,97.679 25.4,96.394 25.4,81.82 ROM1.19 29.23,77.99 45.715,77.99 VIA1.26 53.335,70.37 67.625,70.37 68.58,69.415 68.58,55.13 63.5,50.05 63.5,47.51 66.04,44.97 91.44,44.97 J4.18
GND: 74LS138.8 6502CPU1.21 ACIA1.1 ACIA1.9 C1.2 C2.2 C3.2 C4.2 C5.2 C6.2 C7.2 CLK1.7 DS1813.3 J2.2 J3.2 J4.2 R4.1 RAM1.14 ROM1.14 SW_RES1.1 SW_ROM_SEL1.3 U6.7 UART1.12 UART1.19 UART1.20 VIA1.1 | length 516.4
  F.Cu w0.25: ROM1.14 16.525,98.951 17.78,100.206 17.78,101.504 16.525,102.759 RAM1.14 ; C4.2 53.34,97.427 55.616,99.703 55.616,108.322 C5.2 ; 6502CPU1.21 68.58,133.603 C3.2 74.915,124.955 ACIA1.1 ; 74LS138.8 81.275,67.83 81.28,67.83 85.09,71.64 CLK1.7 96.52,69.98 C2.2 ; U6.7 83.825,98.315 UART1.12 ; ACIA1.9 92.565,119.723 92.565,107.055 UART1.12 ; C6.2 103.725,100.435 ; DS1813.3 106.787,80.24 SW_RES1.1@109.476,80.24 ; UART1.20 UART1.19 103.725,100.435 ; R4.1 109.476,83.954 SW_RES1.1@109.476,80.24 ; J4.2 117.301,50.511 117.301,78.915 115.976,80.24 SW_RES1.1@109.476,80.24 ; UART1.12 91.855,100.435 103.725,100.435
  B.Cu w0.25: RAM1.14 17.78,117.35 17.78,126.767 17.33,127.217 17.33,135.066 17.78,135.515 17.78,137.764 21.506,141.49 54.663,141.49 58.42,137.733 58.42,137.092 59.208,136.304 63.63,136.304 6502CPU1.21 6502CPU1.21@64.982,137.428 ; SW_ROM_SEL1.3 59.545,84.235 59.545,89.525 C4.2 53.34,95.77 50.8,98.31 19.06,98.31 ROM1.14 13.666,92.916 13.666,59.239 VIA1.1 16.365,56.54 18.91,56.54 24.225,51.225 24.225,49.564 24.914,48.875 26.575,48.875 J2.2 29.115,46.335 47.085,46.335 J3.2 55.84,47.51 C1.2 ; ACIA1.1 74.915,135.125 76.2,136.41 83.82,136.41 95.235,124.995 ACIA1.9 101.672,128.83 C7.2 ; CLK1.7 104.001,79.121 DS1813.3 ; C6.2 110.971,87.185 R4.1
Net-(6502CPU1-Pad2): 6502CPU1.2 R1.2 | length 9.2
  F.Cu w0.25: 6502CPU1.2 22.869,126.023 R1.2
Net-(6502CPU1-Pad36): 6502CPU1.36 R2.2 | length 9.1
  F.Cu w0.25: R2.2 22.972,133.746 6502CPU1.36
Net-(ACIA1-Pad11): ACIA1.11 ACIA1.16 ACIA1.17 | length 38.5
  F.Cu w0.25: ACIA1.11 101.455,121.253 103.32,121.253 103.98,121.913 103.98,122.568 107.661,126.25 114.3,126.25 114.3,133.87 109.412,138.758 106.52,138.758 ACIA1.16 ACIA1.17
Net-(D1-Pad1): D1.1 R4.2 | length 4.2
  F.Cu w0.25: R4.2 110.971,97.123 D1.1
PA0: J2.5 VIA1.2 | length 28.9
  F.Cu w0.25: VIA1.2 11.801,51.686 11.801,45.869 12.234,45.436 20.786,45.436 21.685,46.335 21.685,47.996 22.86,49.171 J2.5
PA1: J2.7 VIA1.3 | length 25.6
  F.Cu w0.25: J2.7 20.32,49.171 19.145,47.996 19.145,46.335 18.696,45.886 14.324,45.886 12.25,47.96 12.25,50.236 19.679,57.665 VIA1.3
PA2: J2.9 VIA1.4 | length 20.4
  F.Cu w0.25: 16.605,47.51 16.605,47.214 15.726,46.335 14.754,46.335 12.7,48.389 12.7,50.05 19.19,56.54 21.735,56.54 VIA1.4
PA3: J2.11 VIA1.5 | length 13.3
  F.Cu w0.25: J2.11 19.578,54.388 22.123,54.388 VIA1.5
PA4: J2.12 VIA1.6 | length 17.9
  F.Cu w0.25: J2.12 16.605,48.875 16.605,50.536 20.008,53.939 24.214,53.939 VIA1.6
PA5: J2.10 VIA1.7 | length 17.9
  F.Cu w0.25: J2.10 19.145,48.875 19.145,50.536 22.098,53.489 26.304,53.489 VIA1.7
PA6: J2.8 VIA1.8 | length 17.9
  F.Cu w0.25: J2.8 21.685,48.875 21.685,50.536 24.189,53.04 28.395,53.04 VIA1.8
PA7: J2.6 VIA1.9 | length 17.9
  F.Cu w0.25: J2.6 24.035,48.685 24.035,50.346 24.914,51.225 25.886,51.225 27.252,52.59 30.48,52.59 35.56,57.67 VIA1.9
PB0: J3.5 VIA1.10 | length 28.9
  F.Cu w0.25: VIA1.10 38.1,55.766 33.486,51.152 33.486,44.504 33.919,44.071 39.741,44.071 41.815,46.145 41.815,47.996 43.18,49.362 J3.5
PB1: J3.7 VIA1.11 | length 25
  F.Cu w0.25: J3.7 40.64,49.414 39.275,48.049 39.275,47.024 36.771,44.52 35.374,44.52 34.199,45.695 33.936,45.958 33.936,50.966 35.56,52.59 35.565,52.59 VIA1.11
PB2: J3.9 VIA1.12 | length 24
  F.Cu w0.25: J3.9 38.1,49.171 36.925,47.996 36.925,46.335 35.56,44.97 34.385,46.145 34.385,50.713 40.213,56.54 42.055,56.54 VIA1.12
PB3: J3.11 VIA1.13 | length 14
  F.Cu w0.25: J3.11 35.56,51.252 40.399,56.091 44.146,56.091 VIA1.13
PB4: J3.12 VIA1.14 | length 18.4
  F.Cu w0.25: J3.12 36.925,48.875 36.925,51.415 41.151,55.641 46.236,55.641 VIA1.14
PB5: J3.10 VIA1.15 | length 19.5
  F.Cu w0.25: J3.10 39.275,48.685 39.275,53.129 41.338,55.192 48.327,55.192 VIA1.15
PB6: J3.8 VIA1.16 | length 19.9
  F.Cu w0.25: J3.8 42.005,48.875 42.005,53.955 42.792,54.742 50.417,54.742 VIA1.16
PB7: J3.6 VIA1.17 | length 19.4
  F.Cu w0.25: J3.6 44.545,48.875 44.545,53.118 45.72,54.293 52.508,54.293 VIA1.17
RES: DS1813.1 SW_RES1.2 | length 10.7
  F.Cu w0.25: DS1813.1 106.508,75.74 109.476,75.74 SW_RES1.2@115.976,75.74
ROM_SEL: ROM1.1 SW_ROM_SEL1.2 | length 13.8
  F.Cu w0.25: ROM1.1 49.545,94.485 SW_ROM_SEL1.2
R{slash}{\W\}\: 6502CPU1.34 ACIA1.28 J4.40 U6.9 U6.10 VIA1.22 | length 178.1
  F.Cu w0.25: 6502CPU1.34@31.734,137.664 6502CPU1.34 36.78,142.474 v1(36.784,142.474) ; VIA1.22 66.045,77.99 71.804,77.99 82.099,88.285 85.24,88.285 U6.9 U6.10
  B.Cu w0.25: v1(36.784,142.474) 70.074,142.474 ACIA1.28 74.883,137.633 71.57,134.32 71.57,105.48 86.365,90.685 U6.9 ; VIA1.22 60.96,72.91 62.08,74.03 69.551,74.03 73.21,70.37 73.21,58.306 67.405,52.501 67.405,49.564 66.04,48.198 J4.40
unconnected-(6502CPU1-Pad1): 6502CPU1.1
unconnected-(6502CPU1-Pad3): 6502CPU1.3
unconnected-(6502CPU1-Pad5): 6502CPU1.5
unconnected-(6502CPU1-Pad7): 6502CPU1.7
unconnected-(6502CPU1-Pad35): 6502CPU1.35
unconnected-(6502CPU1-Pad39): 6502CPU1.39
unconnected-(ACIA1-Pad5): ACIA1.5
unconnected-(ACIA1-Pad7): ACIA1.7
unconnected-(CLK1-Pad1): CLK1.1
unconnected-(SW_PWR1-Pad1): SW_PWR1.1
unconnected-(SW_PWR1-Pad2): SW_PWR1.2
unconnected-(SW_PWR1-Pad3): SW_PWR1.3
unconnected-(UART1-Pad1): UART1.1
unconnected-(UART1-Pad2): UART1.2
unconnected-(UART1-Pad3): UART1.3
unconnected-(UART1-Pad4): UART1.4
unconnected-(UART1-Pad5): UART1.5
unconnected-(UART1-Pad6): UART1.6
unconnected-(UART1-Pad7): UART1.7
unconnected-(UART1-Pad8): UART1.8
unconnected-(UART1-Pad9): UART1.9
unconnected-(UART1-Pad13): UART1.13
unconnected-(UART1-Pad15): UART1.15
unconnected-(UART1-Pad16): UART1.16
unconnected-(UART1-Pad17): UART1.17
{\A\C\I\A\_\R\T\S\}\: ACIA1.8 UART1.18 | length 28.7
  F.Cu w0.25: ACIA1.8 94.012,123.71 98.049,123.71 98.9,122.859 98.9,121.33 100.185,120.045 100.185,107.345 UART1.18
{\A\C\I\A\I\R\Q\}\: ACIA1.26 J1.2 R3.2 | length 48.1
  F.Cu w0.25: J1.2 76.2,98.31 v1(76.2,103.39) ; ACIA1.26 80.012,137.617 R3.2
  B.Cu w0.25: v1(76.2,103.39) 76.2,121.17 76.2,130.588 R3.2 ; ACIA1.26 ACIA1.26@80.012,137.617
{\I\O\0\}\: 74LS138.15 J4.20 VIA1.23 | length 70.8
  F.Cu w0.25: VIA1.23 60.505,70.82 66.817,70.82 v1(75.544,79.546) ; J4.20 92.805,48.875 92.805,56.5 74LS138.15
  B.Cu w0.25: v1(75.544,79.546) 76.2,78.89 76.2,65.29 81.435,60.055 94.11,60.055 74LS138.15
{\I\O\1\}\: 74LS138.14 ACIA1.3 J4.22 | length 102.4
  F.Cu w0.25: J4.22 90.265,48.875 90.265,56.5 74LS138.14
  B.Cu w0.25: ACIA1.3 81.312,123.71 90.429,123.71 91.44,122.699 91.44,122.058 92.328,121.17 93.98,121.17 95.395,119.755 95.395,113.72 100.434,108.681 100.434,102.016 101.6,100.85 101.6,78.31 95.395,72.106 95.395,71.174 96.52,70.05 96.52,58.625 95.565,57.67 93.955,57.67 74LS138.14
{\I\O\2\}\: 74LS138.13 J4.24 | length 13
  F.Cu w0.25: J4.24 87.535,48.685 87.535,56.31 74LS138.13
{\I\O\3\}\: 74LS138.12 J4.26 | length 13
  F.Cu w0.25: J4.26 84.995,48.685 84.995,56.31 74LS138.12
{\I\O\4\}\: 74LS138.11 J4.28 | length 13
  F.Cu w0.25: J4.28 82.455,48.685 82.455,56.31 74LS138.11
{\I\O\5\}\: 74LS138.10 J4.30 | length 13
  F.Cu w0.25: J4.30 80.105,48.875 80.105,56.5 74LS138.10
{\I\O\6\}\: 74LS138.9 J4.32 | length 13
  F.Cu w0.25: J4.32 77.565,48.875 77.565,56.5 74LS138.9
{\I\O\7\}\: 74LS138.7 J4.34 | length 23.7
  F.Cu w0.25: J4.34 72.424,48.746 72.424,56.439 74LS138.7
{\I\R\Q\}\: 6502CPU1.4 J1.3 J4.36 | length 135.1
  F.Cu w0.25: v1(48.26,113.55) 50.8,111.01 50.8,103.39 51.25,102.94 51.25,95.979 52.874,94.355 56.725,94.355 60.389,90.69 J1.3
  B.Cu w0.25: 6502CPU1.4 20.48,118.555 20.395,118.555 20.32,118.63 20.01,118.63 17.78,116.4 17.78,113.285 26.897,104.168 38.353,104.168 47.735,113.55 v1(48.26,113.55) ; J1.3 74.11,85.16 74.11,57.933 72.295,56.118 72.295,48.685 J4.36
{\N\M\I\}\: 6502CPU1.6 J1.1 J4.38 | length 133.9
  F.Cu w0.25: 6502CPU1.6 38.336,131.33 v1(53.34,131.33) ; J1.1 v1(68.58,118.63)
  B.Cu w0.25: v1(53.34,131.33) 54.505,130.165 69.745,130.165 70.67,129.24 70.67,120.72 v1(68.58,118.63) ; J4.38 69.945,48.875 69.945,54.405 73.66,58.12 73.66,83.07 67.405,89.325 67.405,92.055 J1.1
{\R\A\M\O\E\}\: RAM1.22 U6.8 U6.12 | length 65.5
  F.Cu w0.25: U6.8 85.174,90.759 92.636,90.759 U6.12
  B.Cu w0.25: RAM1.22 36.381,98.779 74.456,98.779 U6.8
{\R\A\M\W\E\}\: J4.39 RAM1.27 U6.11 | length 104
  F.Cu w0.25: J4.39 69.03,53.04 69.03,70.82 78.74,80.53 83.82,80.53 91.445,88.155 U6.11
  B.Cu w0.25: RAM1.27 48.631,99.229 75.281,99.229 81.28,93.23 82.545,93.23 85.24,90.535 85.24,88.944 86.035,88.15 90.185,88.15 U6.11
{\R\E\S\}\: 6502CPU1.40 ACIA1.4 J4.37 VIA1.34 | length 148.8
  F.Cu w0.25: 6502CPU1.40 12.7,133.634 12.7,77.99 15.24,75.45 27.935,75.45 VIA1.34 37.383,66.002 57.708,66.002 62.375,61.335 62.375,54.042 58.42,50.087 v1(58.42,47.51)
  B.Cu w0.25: v1(58.42,47.51) 59.595,48.685 62.325,48.685 66.04,44.97 67.405,46.335 67.405,48.875 J4.37
{\R\O\M\C\S\}\: ROM1.20 U6.3 | length 73.3
  F.Cu w0.25: ROM1.20 31.32,78.44 71.264,78.44 88.595,95.77 92.725,95.77 U6.3
{\R\O\M\O\E\}\: ROM1.22 U6.6 | length 59.8
  F.Cu w0.25: ROM1.22 35.43,79.41 68.745,79.41 U6.6
{\V\I\A\I\R\Q\}\: J1.4 VIA1.21 | length 36.5
  B.Cu w0.25: VIA1.21 62.375,71.78 60.494,71.78 59.545,72.73 59.545,74.035 66.04,80.53 66.04,93.23 67.215,94.405 69.755,94.405 69.755,92.055 J1.4

## Silkscreen, mask and mechanical layers (free items; w line width, h text height)
F.SilkS:
  lines w0.15: 10.16,141.49 10.16,42.43 119.38,42.43 119.38,141.49